# Altium PCB triac.PcbDoc
Units mm, origin at the board's own origin, x right, y up, seen from the top; angles counter-clockwise.
Board outline 89.15 x 65.15 mm, 2 copper layers (Top Layer, Bottom Layer); 27 components, 19 nets, 86 pads, 2 vias.
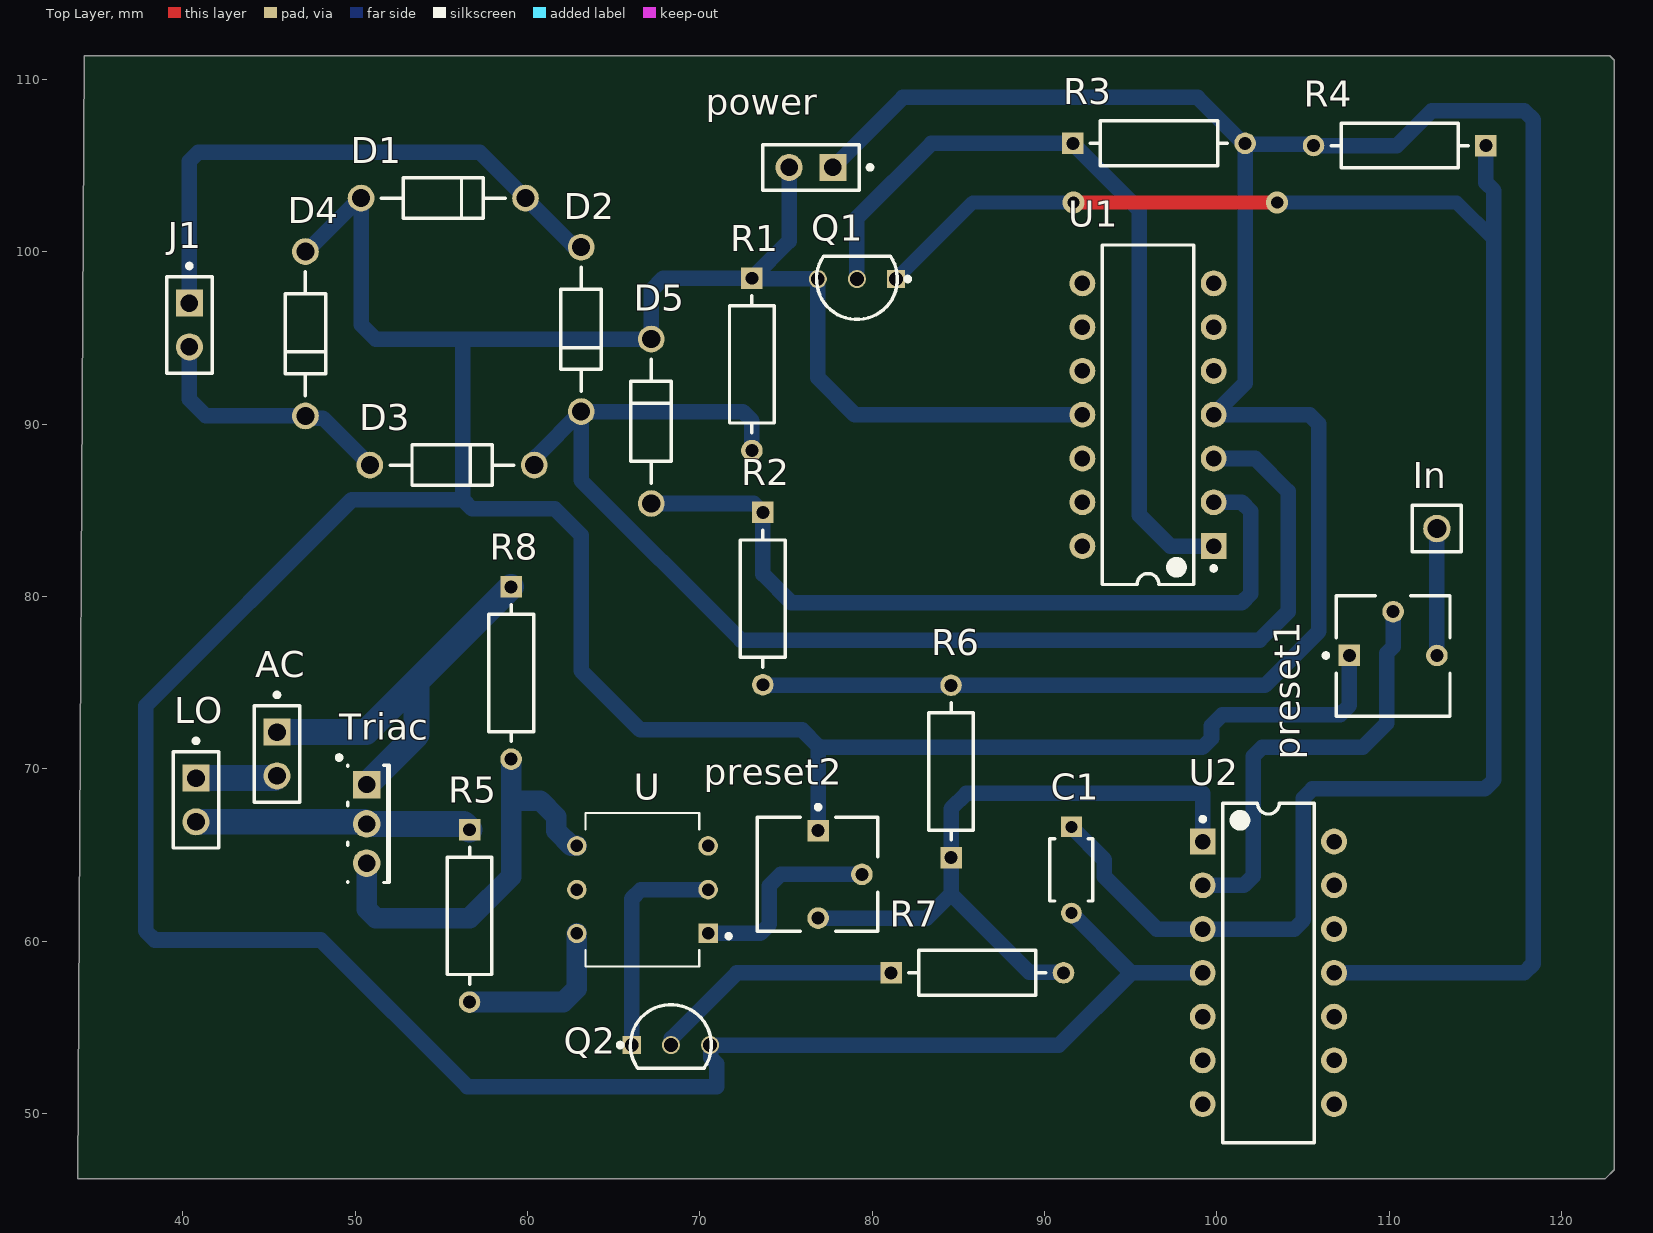
[diagram p0: Top Layer view]
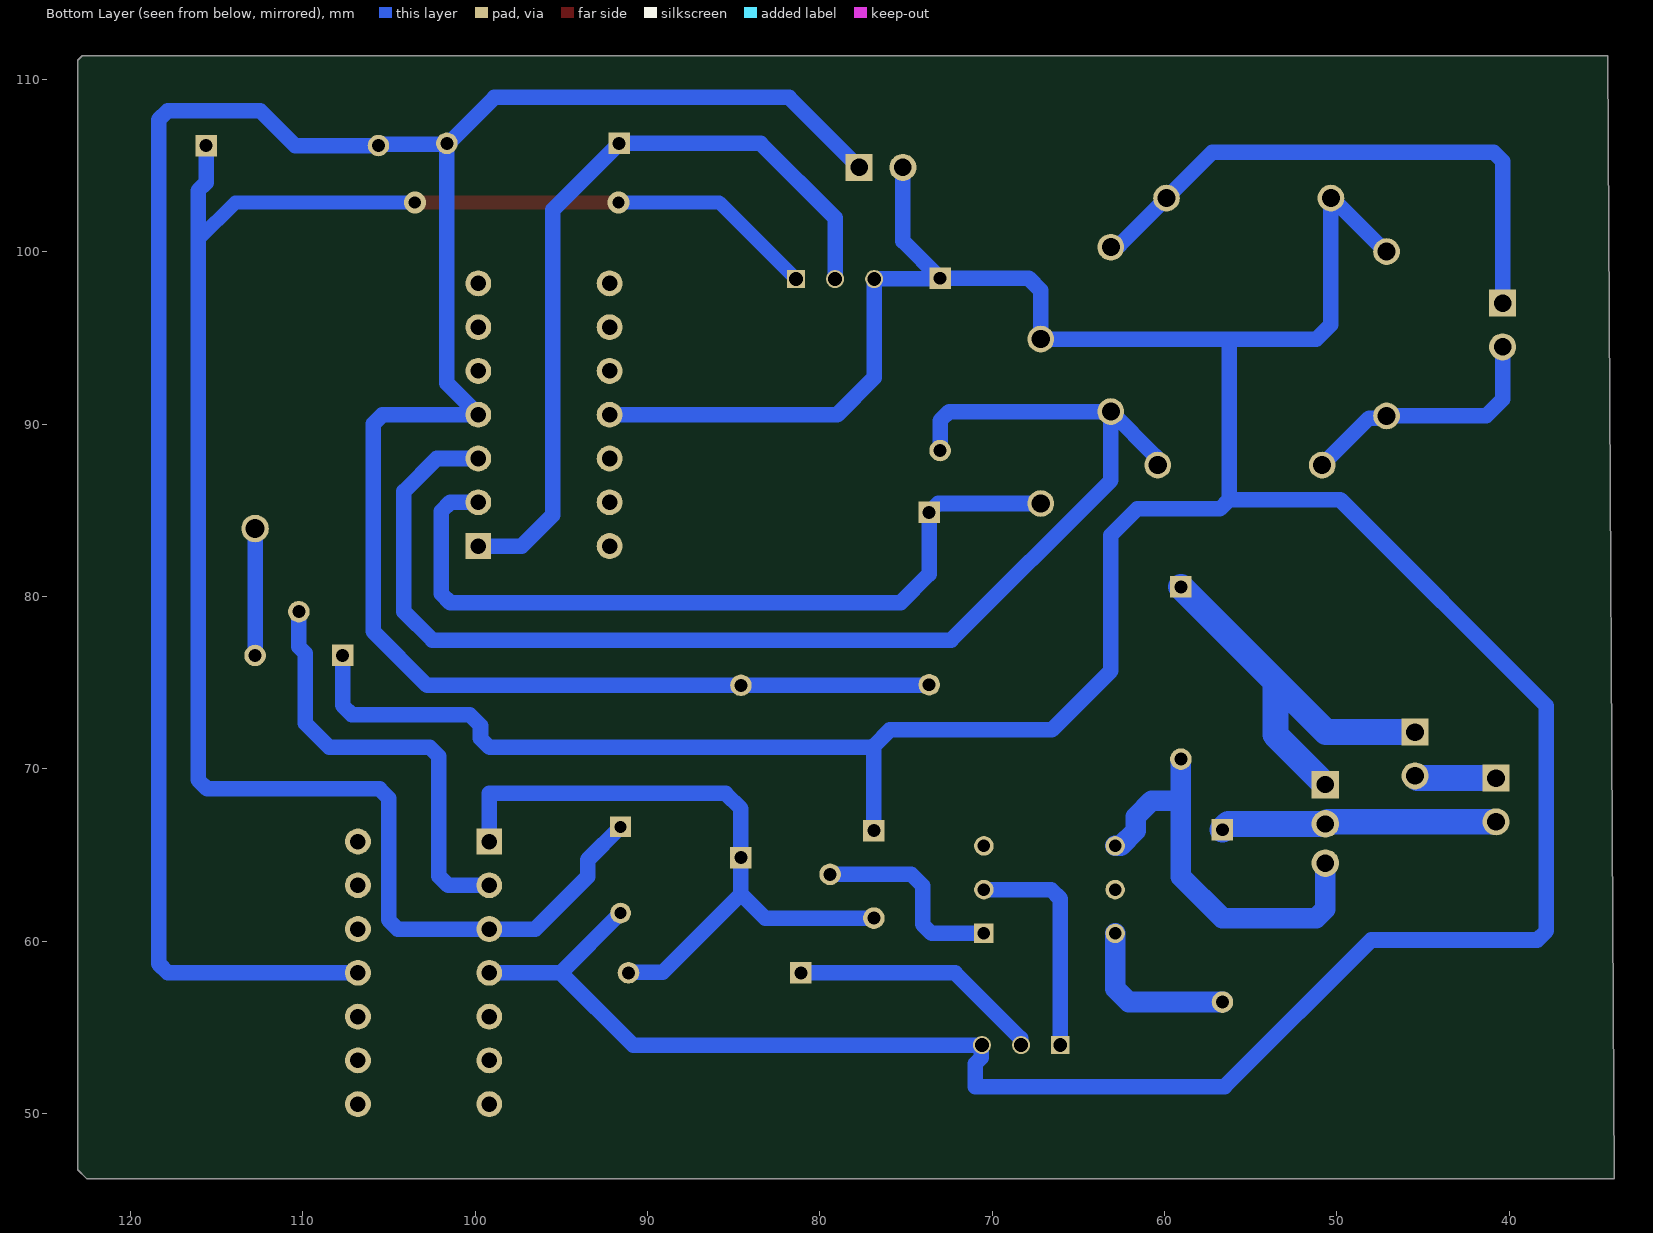
[diagram p1: Bottom Layer view, seen from below]
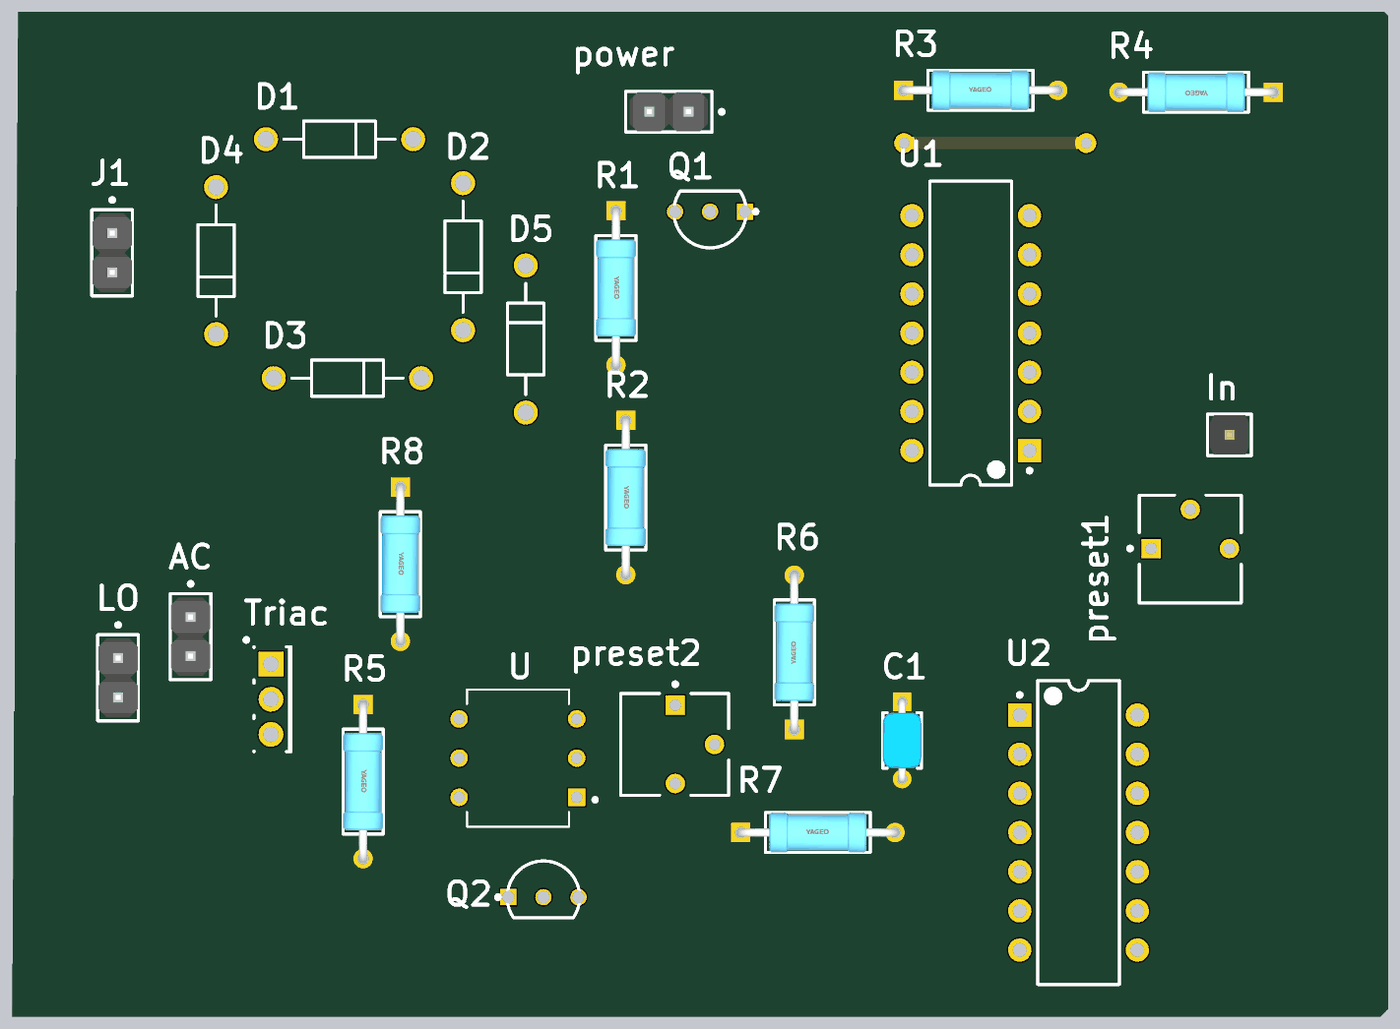
[diagram p2: 3D render of the assembled board from above, using the file's embedded part models]

## Layer stack, top to bottom
Top Solder: solder mask 0.0102, Solder Resist, Dk 3.5
Top Layer: signal copper 0.0356
Dielectric 1: dielectric 0.32, FR-4, Dk 4.8
Bottom Layer: signal copper 0.0356
Bottom Solder: solder mask 0.0102, Solder Resist, Dk 3.5

## Board outline
34.29,111.379 122.809,111.379 123.063,111.125 123.063,46.736 122.555,46.228 33.909,46.228

## Design rules (kind name [scope] priority, off if disabled: settings)
Clearance [All] p1: gap=0.254 ignorepadtopadclearanceinfootprint=FALSE except(0: Arc-Hole Track-Hole SMDPad-Hole THPad-Hole Via-Hole Fill-Hole Poly-Hole Region-Hole Text-Hole)
PolygonConnect [All] p1: connectstyle=Relief reliefconductorwidth=0.254 reliefentries=4 polygonreliefangle="90 Angle" airgapwidth=0.254
RoutingVias [All] p1: holewidth=0.711 width=1.27 viastyle="Through Hole" minholewidth=0.711 minwidth=1.27 maxholewidth=0.711 maxwidth=1.27
SilkToSolderMaskClearance [IsPad] p1: minsilkscreentomaskgap=0.1 clearancetoexposedcopper=TRUE
SolderMaskExpansion [All] p1: expansion=0.102 istentingtop=FALSE
Width Width_POw [InNet('NetAC_1') OR InNet('NetAC_2') OR InNet('NetLO_2')] p1: maxlimit=1.5 minlimit=1.5 preferedwidth=1.5
Width Width_1 [All] p2: maxlimit=1.2 minlimit=0.8 preferedwidth=0.9
29 further rules are at their usual default settings.

## Components (designator, comment, footprint, x,y, rotation, side; value= is the part's Value field where it differs from the comment)
AC "M20-9990246" FP-M20-9990246-MFG 45.466,70.866 r270 top
C1 "RCE5C1H332J0M1H03A" FP-RCE0K1-MFG 91.567,64.135 r270 top
D1 "1N4007G" ONSC-AXIAL_LEAD-2-59-10_P 55.118,103.124 r180 top
D2 "1N4007G" ONSC-AXIAL_LEAD-2-59-10_P 63.119,95.504 r90 top
D3 "1N4007G" ONSC-AXIAL_LEAD-2-59-10_P 55.626,87.63 r180 top
D4 "1N4007G" ONSC-AXIAL_LEAD-2-59-10_P 47.117,95.25 r90 top
D5 "1N4007G" ONSC-AXIAL_LEAD-2-59-10_P 67.183,90.17 r270 top
In "61300111121" 61300111121 112.776,83.947 r180 top
J1 "M20-9990246" FP-M20-9990246-MFG 40.386,95.758 r270 top
LO "M20-9990246" FP-M20-9990246-MFG 40.767,68.199 r270 top
power "M20-9990246" FP-M20-9990246-MFG 76.454,104.902 r180 top
preset1 "3362P-1-103LF" BOUR-3362P 110.236,76.546 r0 top
preset2 "3362P-1-103LF" BOUR-3362P 76.835,63.881 r270 top
Q1 "BC547BG" ONSC-TO-92-3-29-11 79.121,98.425 r180 top
Q2 "BC547BG" ONSC-TO-92-3-29-11 68.326,53.975 r0 top
R1 "MFR-25FBF52-1K18" FP-MFR-25-MFG 73.025,93.472 r270 top value=1.18kΩ
R2 "MFR-25FBF52-1K18" FP-MFR-25-MFG 73.66,79.883 r270 top value=1.18kΩ
R3 "MFR-25FBF52-1K18" FP-MFR-25-MFG 96.647,106.299 r0 top value=1.18kΩ
R4 "MFR-25FBF52-1K18" FP-MFR-25-MFG 110.617,106.172 r180 top value=1.18kΩ
R5 "MFR-25FBF52-1K18" FP-MFR-25-MFG 56.642,61.468 r270 top value=1.18kΩ
R6 "MFR-25FBF52-1K18" FP-MFR-25-MFG 84.582,69.85 r90 top value=1.18kΩ
R7 "MFR-25FBF52-1K18" FP-MFR-25-MFG 86.106,58.166 r0 top value=1.18kΩ
R8 "MFR-25FBF52-1K18" FP-MFR-25-MFG 59.055,75.565 r270 top value=1.18kΩ
Triac "Triac" 369-03 50.673,66.808 r270 top
U "MOC3021" DIP762W45P254L889H508Q6 66.675,62.992 r180 top
U1 "LM324N" N0014A 96.012,90.551 r180 top
U2 "LM324N" N0014A 102.997,58.166 r0 top

## Footprints (in the part's own frame and the unit in brackets; to place one, negate y for a bottom-side part, rotate by r counter-clockwise, add the part's x,y. Pads: shape width x height; smd on the part's side, far side on the other; paste and mask are expansions set on the pad)
369-03 [mm] "TO, Thru-Hole, Vertical, Heatsink Mounted; 3 In-Line Leads; Pitch 2.28 mm"
  rect 1.6x1.6 hole 1: 1(-2.28,0)
  round 1.6 hole 1: 2(0,0) 3(2.28,0)
  silkscreen extent -3.97,-1.72 3.4,1.3, body extent -3.45,-1.15 3.45,1.35, height 9.7
61300111121 [mm] "Pin Header, pitch 2.54 mm, THT, Vertical, single row, 1p"
  round 1.6 hole 1.1: 1(0,0)
  silkscreen extent -1.42,-1.34 1.42,1.34, body extent -1.27,-1.27 1.27,1.27, height 8.57
BOUR-3362P [mm] "THD, 3-Leads, Body 6.6x6.99mm, Pitch 2.54mm"
  rect 1.25x1.25 hole 0.75: 1(-2.54,0.035)
  round 1.25 hole 0.75: 2(0,2.575) 3(2.54,0.035)
  silkscreen extent -4.02,-3.49 3.3,3.49, body extent -3.3,-3.49 3.3,3.49, height 4.95
DIP762W45P254L889H508Q6 [mm]
  rect 1.13x1.13 hole 0.73: 1(-3.81,2.54)
  round 1.13 hole 0.73: 2(-3.81,0) 3(-3.81,-2.54) 4(3.81,-2.54) 5(3.81,0) 6(3.81,2.54)
  silkscreen extent -5.12,-4.45 3.3,4.45
FP-M20-9990246-MFG [mm]
  rect 1.57x1.57 hole 1.02 paste-1000 mask+0: 1(-1.27,0)
  round 1.57 hole 1.02 paste-1000 mask+0: 2(1.27,0)
  silkscreen extent -3.55,-1.32 2.79,1.32, body extent -2.89,-1.42 2.89,1.42, height 0.25
FP-MFR-25-MFG [mm]
  rect 1.25x1.25 hole 0.75 paste-1000 mask+0: 1(-5,0)
  round 1.25 hole 0.75 paste-1000 mask+0: 2(5,0)
  silkscreen extent -3.97,-1.3 3.97,1.3, body extent -5.72,-1.4 5.72,1.4, height 0.25
FP-RCE0K1-MFG [mm]
  rect 1.2x1.2 hole 0.7 paste-1000 mask+0: 1(-2.5,0)
  round 1.2 hole 0.7 paste-1000 mask+0: 2(2.5,0)
  silkscreen extent -1.8,-1.25 1.8,1.25, body extent -3.2,-1.35 3.2,1.35, height 0.25
N0014A [mm] "DIP, 14-Leads, Body 19.7x6.6mm, Pitch 2.54mm"
  rect 1.5x1.5 hole 0.9: 1(-3.81,7.62)
  round 1.5 hole 0.9: 2(-3.81,5.08) 3(-3.81,2.54) 4(-3.81,0) 5(-3.81,-2.54) 6(-3.81,-5.08) 7(-3.81,-7.62) 8(3.81,-7.62) 9(3.81,-5.08) 10(3.81,-2.54) 11(3.81,0) 12(3.81,2.54) 13(3.81,5.08) 14(3.81,7.62)
  silkscreen extent -3.94,-9.85 2.65,9.85, body extent -3.95,-9.85 3.95,9.85, height 5.08
ONSC-AXIAL_LEAD-2-59-10_P [mm] "AXIAL, 2-Leads, Diameter 2.35mm"
  round 1.55 hole 1.05: 1(-4.77,0) 2(4.77,0)
  silkscreen extent -3.6,-1.18 3.6,1.18
ONSC-TO-92-3-29-11 [mm] "TO, 3-Leads, Body Dia 4.7mm, Pitch 1.27mm"
  rect 1.05x1.05 hole 0.8: 1(-2.27,0)
  round 1.05 hole 0.8: 2(0,0) 3(2.27,0)
  silkscreen extent -3.08,-1.34 2.35,2.35, body extent -2.35,-1.33 2.36,2.36, height 7.87

## Part data
AC J1 LO power: library part CMP-15831-000009-1, "CONN HEADER VERT 2POS 2.54MM", Current Rating=3A, Manufacturer=Harwin, Temperature="-40°C to +105°C", Temperature Range High=+105°C, Temperature Range Low=-40°C, Automotive=No, Category=Conn, ComponentLink2Description=Datasheet, ComponentLink2URL=https://cdn.harwin.com/pdfs/M20-999.pdf, Conn Gender=Male, Conn Orientation=Vertical, Contact Material=Tin,Nickel, Device Class L1=Connectors, Device Class L2="Headers and Wire Housings", Device Class L3=unset, Digikey Description="CONN HEADER VERT 2POS 2.54MM", Height=8.99mm, Lead Free=Yes, Manufacturer Part Number=M20-9990246, Mouser Description="2.54mm (0.1\") Pitch SIL Vertical PC Tail Pin Header, 6.1mm mating pin height, tin, 2 contacts", Number Of Contacts=2, Number Of Rows=1, Octopart=https://octopart.com/m20-9990246-harwin-2590635, Package=M20-9990246, Pitch=2.54mm, RoHS=TRUE
C1: library part CMP-06035-032713-1, "Cap Ceramic 3.3nF 50V C0G ±5% Radial 5mm +125°C Automotive Bulk", Capacitance=3.3nF, Case/Package=Radial, Dielectric=C0G, Max Operating Temperature=125°C, Min Operating Temperature=-55°C, Package Quantity=2000, Ratings=AEC-Q200, Resistor Type=Ceramic, Tolerance=5%, Voltage Rating=50V, Height=3.5mm, Height - Seated (Max)=0.138inch, Lead Diameter=0.5mm, Lead Pitch=0.197inch, Lead/Base Style="Formed Leads", Length=0.142inch, Mount="Through Hole", Packaging="Tape and Reel", Termination=Radial, Voltage Rating (DC)=50V, Width=0.098inch
D1 D2 D3 D4 D5: library part CMP-0902-00143-1, "Standard Recovery Rectifier, 2-Pin Axial_Lead, Pb-Free, Bulk Bag", Manufacturer="On Semiconductor", ComponentLink1Description="Manufacturer URL", ComponentLink1URL=http://www.onsemi.com/, ComponentLink2Description=Datasheet, ComponentLink2URL=http://www.onsemi.com/pub_link/Collateral/1N4001-D.PDF, ComponentLink3Description="Package Specification", ComponentLink3URL=http://www.onsemi.cn/pub_link/Collateral/59-10.PDF, DatasheetVersion="Rev. 13", IFSM Max (A)=30, IO(rec) Max (A)=1, Mounting Technology="Through Hole", PackageDescription="2-Pin, Axial Lead, Diameter 2.35 mm", PackageReference=AXIAL_LEAD-2-59-10, PackageVersion="Rev. U, 02/2005", Packing="Bulk Bag", PartNumber=1N4007G, RoHS=TRUE, Type="Standard Recovery", VRRM Max (V)=1000
In: library part CMP-1502-01058-1, "THT Vertical Pin Header WR-PHD, Pitch 2.54 mm, Single Row, 1 pins", Contact Resistance=20mOhm, Manufacturer="Wurth Elektronik", Operating Temperature=-40to105degC, Rated Current=3A, Withstanding Voltage=500VAC, Working Voltage=250VAC, Datasheet URL=https://katalog.we-online.de/em/datasheet/6130xx11121.pdf, Gender=Male, Manufacturer URL=http://www.we-online.de, Mounting Technology=THT, Orientation=Vertical, Package Reference=61300111121, Packaging=Bag, Part Number=61300111121, Pin Number=1, Pitch=2.54mm, Publisher=WurthElektronik, Row Number=Single
preset1 preset2: library part CMP-1747-00004-1, "Square Trimpot(R) Trimming Potentiometer, 10 KOhm, 300 V, -55 to 125 degC, 3-Pin THD, RoHS, Tube", Case Code (Imperial)=0612, Case Code (Metric)=1632, Case/Package=1206, Max Operating Temperature=125degC, Min Operating Temperature=-25degC, Package Quantity=5000, Power Rating="1 W", Resistance="50 mohm", Tolerance=1%, Voltage Rating="220 mV", ComponentLink1Description="Manufacturer URL", ComponentLink1URL=http://www.bourns.com/, ComponentLink2Description=Datasheet, ComponentLink2URL=http://www.bourns.com/docs/Product-Datasheets/3362.pdf, DatasheetVersion=May-16, Height="0.6 mm", Length="3.2 mm", Mount="Surface Mount", PackageDescription="3-Pin Through Hole Device, Body 6.6 x 6.99 mm, Pitch 2.54 mm", PackageReference=3326P, Packaging="Tape and Reel", Pins=2, REACH SVHC="No SVHC", RoHSCompliant=True, Width="1.6 mm"
Q1 Q2: library part CMP-1048-01469-1, "Amplifier Transistor, NPN Silicon, 3-Pin TO-92, Pb-Free, Bulk Box", Manufacturer="On Semiconductor", ComponentLink1Description="Manufacturer URL", ComponentLink1URL=http://www.onsemi.com/, ComponentLink2Description=Datasheet, ComponentLink2URL=http://www.onsemi.com/pub_link/Collateral/BC546-D.PDF, ComponentLink3Description="Package Specification", ComponentLink3URL=http://www.onsemi.cn/pub_link/Collateral/2N6426-D.PDF, DatasheetVersion="Rev. 7", fT Min (MHz)=150, IC Continuous (A)=0.1, Mounting Technology="Through Hole", PackageDescription="3-Pin Transistor Outline, Body 4.825 x 3.685 mm, Pitch 1.27 mm", PackageReference=TO-92-3-29-11_AM_SL, PackageVersion="Rev. AM", Packing="Bulk Box", PartNumber=BC547BG, Polarity=NPN, RoHS=TRUE
R1 R2 R3 R4 R5 R6 R7 R8: library part CMP-03413-000001-1, "RES 1.18K OHM 1/4W 1% AXIAL", Manufacturer=Yageo, Package=MFR-25, Power Rating=0.25W, Resistance=1.18kΩ, Temperature="-55°C to +155°C", Temperature Coefficient=100ppm/°C, Temperature Range High=+155°C, Temperature Range Low=-55°C, Tolerance=1%, Voltage Rating=250V, Automotive=No, Category=Res, ComponentLink2Description=Datasheet, ComponentLink2URL=https://www.yageo.com/upload/media/product/products/datasheet/lr/Yageo_LR_MFR_1.pdf, Composition="Metal Film", Device Class L1="Passive Components", Device Class L2=Resistors, Device Class L3="Through-Hole Resistors", Digikey Description="RES 1.18K OHM 1/4W 1% AXIAL", Height=2.6mm, Ipc Land Pattern Name=RESAD1000W75L680D260, Lead Free=Yes, Manufacturer Part Number=MFR-25FBF52-1K18, Mouser Description="Metal Film Resistors 1.18K OHM 1/4W 1%", Octopart=https://octopart.com/mfr-25fbf52-1k18-yageo-56251681, RoHS=TRUE, Series=MFR
Triac: "Silicon Bidirectional Triode Thyristor", ComponentLink1Description="Manufacturer Link", ComponentLink1URL=http://www.motorola.com/, DatasheetVersion=1999, LatestRevisionDate=17-Jul-2002, LatestRevisionNote="Re-released for DXP Platform.", Note="Pin 2 is electrically connected to Pin 4 (TAB)", PackageDescription="TO, Thru-Hole, Vertical, Heatsink Mounted; 3 In-Line Leads; Pitch 2.28 mm", PackageReference=369-03, Published=29-Sep-2000, Publisher="Altium Limited"
U: "Optoisolator Triac Output 5000Vrms 1 Channel 6-DIP", Package="DIP-6 Lite-On", Availability=Unavailable, MF=Lite-On, MP=MOC3021, Price=None, SnapEDA_Link=https://www.snapeda.com/parts/MOC3021/Lite-On/view-part/4551083/?ref=snap
U1 U2: library part CMP-0055-00082-3, "Low Power Quad Operational Amplifier, 14-pin MDIP", Manufacturer="Texas Instruments", Package Reference=N0014A, PackageTopMarking=NSUZXYYTTE#*LM324N, PowerWise=N, Code_JEDEC=MS-001-AA, ComponentLink1Description="Datasheet URL", ComponentLink1URL=http://www.ti.com/general/docs/lit/getliterature.tsp?genericPartNumber=LM324&fileType=pdf, CompType=Amplifiers, PackageDescription="MDIP, .750 x .250 x.130in, 14 Lead, .100in Pitch", PinCount=14, RoHS=N

## Via types
v1: diameter 1.27, hole 0.711, Top Layer to Bottom Layer, 2 vias

## Nets (pads, with @x,y where several pads share a name; then routed paths per layer and width w, separated by ;. In a path a pad name is that pad's centre, name@x,y a point inside that pad or via, vN(x,y) a via of type N, cw(c..) or ccw(c..) an arc to the next point about the centre after c; other vN are vias at no path point)
+12: power.1 R2.2 R3.2 R4.2 R6.2 U1.4 U2.11 | length 173.7
  Bottom Layer w0.9: R2.2 73.677,74.867 84.565,74.867 R6.2 102.79,74.85 105.918,77.978 105.918,90.024 105.391,90.551 U1.4 101.647,92.376 R3.2 ; power.1 81.788,108.966 98.885,108.966 101.552,106.299 R3.2 ; U2.11 117.837,58.166 118.364,58.693 118.364,107.677 117.837,108.204 112.49,108.204 110.458,106.172 R4.2 105.554,106.236 101.71,106.236 R3.2
GND: C1.2 D1.2 D4.2 D5.1 power.2 preset1.1 preset2.1 Q1.3 Q2.3 R1.1 U1.11 U2.4 | length 263.2
  Top Layer w0.9: D4.2 D4.2@47.18,100.02 ; D1.2@50.284,103.124 D1.2 ; Q2.3 Q2.3@70.625,53.946 ; R1.1 R1.1@73.152,98.599
  Bottom Layer w0.9: D4.2@47.18,100.02 D1.2@50.284,103.124 ; D1.2 50.348,95.777 51.185,94.94 56.007,94.94 ; power.2 75.184,100.631 R1.1 ; preset2.1 76.87,71.339 75.946,72.263 66.548,72.263 63.119,75.692 63.119,83.566 61.595,85.09 56.788,85.09 56.261,85.617 ; 76.87,71.247 99.168,71.247 99.695,71.774 99.695,72.517 100.33,73.152 107.169,73.152 107.696,73.679 preset1.1 ; C1.2 95.036,58.166 ; U1.11 78.994,90.551 76.851,92.694 Q1.3 76.828,98.448 73.048,98.448 R1.1 ; U2.4 95.036,58.166 ; 56.007,94.94 56.261,94.686 56.261,85.617 ; 56.007,94.94 D5.1 67.183,97.771 67.884,98.472 R1.1 ; 56.261,85.617 49.803,85.617 37.846,73.66 37.846,60.598 38.373,60.071 48.006,60.071 56.515,51.562 70.993,51.562 70.993,52.884 70.625,53.252 70.625,53.946 Q2.3 90.845,53.975 95.036,58.166
NetAC_1: AC.1 R8.1 Triac.1 | length 24.3
  Top Layer w0.3: Triac.1@50.626,69.135 Triac.1
  Bottom Layer w1.5: AC.1 50.626,72.136 53.571,75.08 ; Triac.1 53.571,71.986 53.571,75.08 ; R8.1 53.571,75.08
NetAC_2: AC.2 LO.1 | length 4.9
  Top Layer w0.9: LO.1 LO.1@40.831,69.532 ; AC.2@45.402,69.532 AC.2
  Bottom Layer w1.5: LO.1 45.32,69.469 45.447,69.596 AC.2
NetC1_1: C1.1 Q1.1 R4.1 U2.3 | length 109.7
  Top Layer w0.8: v1(91.694,102.87) v1(103.505,102.87)
  Bottom Layer w0.8: Q1.1 85.836,102.87 v1(91.694,102.87) ; v1(103.505,102.87) 113.919,102.87 116.078,100.711
  Bottom Layer w0.9: C1.1 93.472,64.73 93.472,63.754 96.52,60.706 U2.3 104.502,60.706 105.029,61.233 105.029,68.307 105.556,68.834 115.551,68.834 116.078,69.361 116.078,100.711 116.078,103.552 115.617,104.013 R4.1
NetD1_1: D1.1 D2.2 J1.1 | length 33.5
  Top Layer w0.9: D2.2@62.995,100.398 D2.2
  Bottom Layer w0.9: J1.1 40.386,105.264 40.913,105.791 57.221,105.791 D1.1 62.614,100.398 D2.2@62.995,100.398
NetD2_1: D2.1 D3.1 R1.2 U1.3 | length 77.8
  Top Layer w0.9: D3.1 D3.1@60.52,87.754 ; R1.2 R1.2@73.048,88.496
  Bottom Layer w0.9: D3.1@60.52,87.754 60.52,88.135 D2.1 ; R1.2 73.025,90.207 72.498,90.734 D2.1 ; U1.3 102.235,88.011 104.14,86.106 104.14,79.121 102.489,77.47 72.39,77.47 63.119,86.741 D2.1
NetD3_2: D3.2 D4.1 J1.2 | length 15.1
  Top Layer w0.9: D4.1 D4.1@47.241,90.356
  Bottom Layer w0.9: J1.2 40.386,91.44 41.346,90.48 D4.1 ; D4.1@47.241,90.356 48.13,90.356 D3.2
NetD5_2: D5.2 R2.1 U1.2 | length 46.7
  Bottom Layer w0.9: D5.2 73.143,85.4 R2.1 73.66,81.299 75.319,79.64 101.454,79.64 101.981,80.167 101.981,84.944 101.454,85.471 U1.2
NetIn_1: In.1 preset1.3 | length 7.4
  Bottom Layer w0.9: preset1.3 In.1
NetLO_2: LO.2 R5.1 Triac.2 | length 16.2
  Top Layer w0.9: LO.2 LO.2@40.828,66.868 ; Triac.2@50.612,66.868 Triac.2
  Bottom Layer w1.5: LO.2 50.525,66.929 50.646,66.808 Triac.2 56.302,66.808 R5.1
Netpreset1_2: preset1.2 U2.2 | length 25.3
  Bottom Layer w0.9: U2.2 101.581,63.246 102.108,63.773 102.108,70.72 102.635,71.247 108.458,71.247 109.855,72.644 109.855,76.696 110.236,77.077 preset1.2
Netpreset2_2: preset2.2 U.1 | length 11.7
  Bottom Layer w0.9: U.1 73.514,60.452 74.041,60.979 74.041,63.227 74.695,63.881 preset2.2
Netpreset2_3: preset2.3 R6.1 R7.2 U2.1 | length 39.4
  Bottom Layer w0.9: preset2.3 83.185,61.341 84.582,62.738 ; R7.2 91.083,58.189 89.131,58.189 84.582,62.738 ; U2.1 99.187,68.58 85.471,68.58 84.582,67.691 R6.1 84.582,62.738
NetQ1_2: Q1.2 R3.1 U1.1 | length 46.1
  Bottom Layer w0.9: Q1.2 79.121,101.981 83.439,106.299 R3.1 95.504,102.442 95.504,84.728 97.301,82.931 U1.1
NetQ2_1: Q2.1 U.2 | length 13.1
  Bottom Layer w0.9: Q2.1 66.056,62.465 66.583,62.992 U.2
NetQ2_2: Q2.2 R7.1 | length 14.7
  Top Layer w0.9: Q2.2 Q2.2@68.355,54.004
  Bottom Layer w0.9: Q2.2@68.355,54.004 68.355,54.366 72.155,58.166 R7.1
NetR5_2: R5.2 U.6 | length 9.7
  Bottom Layer w1.2: R5.2 62.084,56.468 62.865,57.249 U.6
NetR8_2: R8.2 Triac.3 U.4 | length 24.2
  Bottom Layer w1.2: Triac.3 50.673,61.868 51.2,61.341 56.642,61.341 59.055,63.754 59.055,67.493 59.055,68.154 ; 59.055,69.028 59.055,68.154 ; 59.055,69.275 R8.2 ; U.4 62.551,65.532 61.677,66.406 61.677,67.228 60.751,68.154 59.055,68.154
pads on no net: U1.5 U1.6 U1.7 U1.8 U1.9 U1.10 U1.12 U1.13 U1.14 U2.5 U2.6 U2.7 U2.8 U2.9 U2.10 U2.12 U2.13 U2.14 U.3 U.5